# Altium PCB DX-ATGM336H_PCB_Part_AD.PcbDoc
Units mil, origin at the board's own origin, x right, y up, seen from the top; angles counter-clockwise.
Board outline 6000 x 4000 mil, 2 copper layers (Top Layer, Bottom Layer); 1 components, 0 nets, 36 pads, 0 vias.
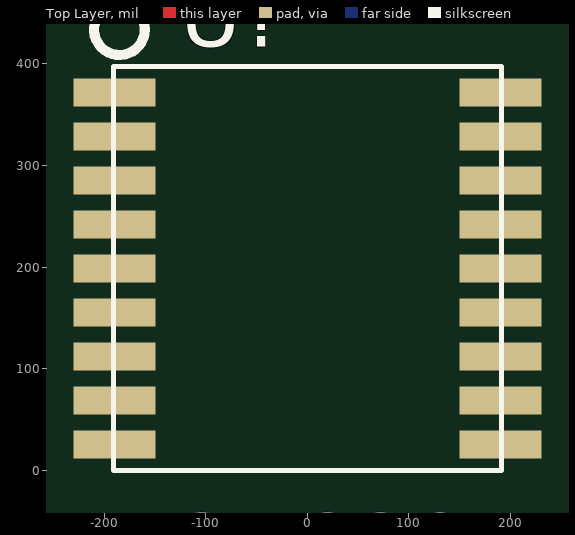
[diagram p0: Top Layer view]
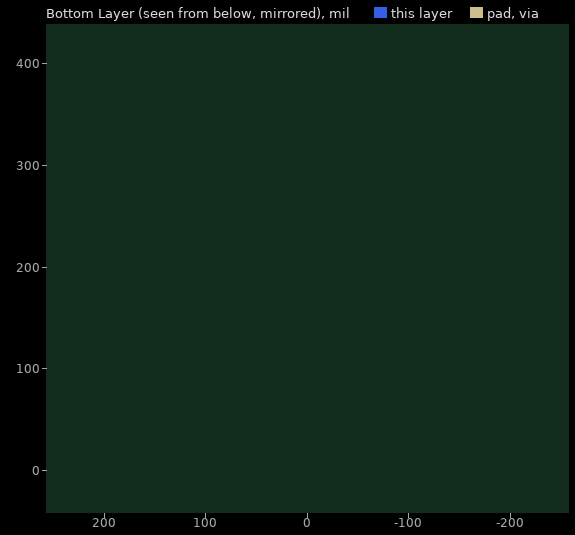
[diagram p1: Bottom Layer view, seen from below]

## Layer stack, top to bottom
Top Solder: solder mask 0.4, Solder Resist, Dk 3.5
Top Layer: signal copper 1.4
Dielectric 1: dielectric 12.6, FR-4, Dk 4.8
Bottom Layer: signal copper 1.4
Bottom Solder: solder mask 0.4, Solder Resist, Dk 3.5

## Board outline
-2834.96,-1617.95 3165.04,-1617.95 3165.04,2382.05 -2834.96,2382.05

## Design rules (kind name [scope] priority, off if disabled: settings)
Clearance [All] p1: gap=10 ignorepadtopadclearanceinfootprint=FALSE except(0: Arc-Hole Track-Hole SMDPad-Hole THPad-Hole Via-Hole Fill-Hole Poly-Hole Region-Hole Text-Hole)
PolygonConnect [All] p1: connectstyle=Relief reliefconductorwidth=10 reliefentries=4 polygonreliefangle="90 Angle" airgapwidth=10
RoutingVias [All] p1: holewidth=28 width=50 viastyle="Through Hole" minholewidth=28 minwidth=50 maxholewidth=28 maxwidth=50
SolderMaskExpansion [All] p1: expansion=4 istentingtop=FALSE
Width [All] p1: maxlimit=10 minlimit=10 preferedwidth=10
30 further rules are at their usual default settings.

## Components (designator, comment, footprint, x,y, rotation, side; value= is the part's Value field where it differs from the comment)
U? "ATGM336H" N10_BLGA_18P 0,198.82 r270 top

## Footprints (in the part's own frame and the unit in brackets; to place one, negate y for a bottom-side part, rotate by r counter-clockwise, add the part's x,y. Pads: shape width x height; smd on the part's side, far side on the other; paste and mask are expansions set on the pad)
N10_BLGA_18P [mm]
  rect 0.7x2.05 smd: 1(-4.4,-4.825) 2(-3.3,-4.825) 3(-2.2,-4.825) 4(-1.1,-4.825) 5(0,-4.825) 6(1.1,-4.825) 7(2.2,-4.825) 8(3.3,-4.825) 9(4.4,-4.825) 10(4.4,4.825) 11(3.3,4.825) 12(2.2,4.825) 13(1.1,4.825) 14(0,4.825) 15(-1.1,4.825) 16(-2.2,4.825) 17(-3.3,4.825) 18(-4.4,4.825)
  rect 0.7x2.05 on Top Solder: 1(-4.4,-4.825) 2(-3.3,-4.825) 3(-2.2,-4.825) 4(-1.1,-4.825) 5(0,-4.825) 6(1.1,-4.825) 7(2.2,-4.825) 8(3.3,-4.825) 9(4.4,-4.825) 10(4.4,4.825) 11(3.3,4.825) 12(2.2,4.825) 13(1.1,4.825) 14(0,4.825) 15(-1.1,4.825) 16(-2.2,4.825) 17(-3.3,4.825) 18(-4.4,4.825)
  silkscreen extent -6.6,-5.33 5.05,4.85

## Nets (pads, with @x,y where several pads share a name; then routed paths per layer and width w, separated by ;. In a path a pad name is that pad's centre, name@x,y a point inside that pad or via, vN(x,y) a via of type N, cw(c..) or ccw(c..) an arc to the next point about the centre after c; other vN are vias at no path point)
pads on no net: U?.1 U?.2 U?.3 U?.4 U?.5 U?.6 U?.7 U?.8 U?.9 U?.10 U?.11 U?.12 U?.13 U?.14 U?.15 U?.16 U?.17 U?.18